# Altium PCB endstop.PcbDoc
Units mm, origin at the board's own origin, x right, y up, seen from the top; angles counter-clockwise.
Board outline 6.4 x 12 mm, 2 copper layers (Top Layer, Bottom Layer); 10 components, 7 nets, 21 pads, 5 vias.
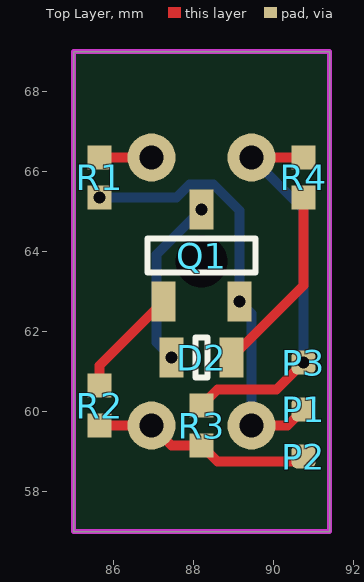
[diagram p0: Top Layer view]
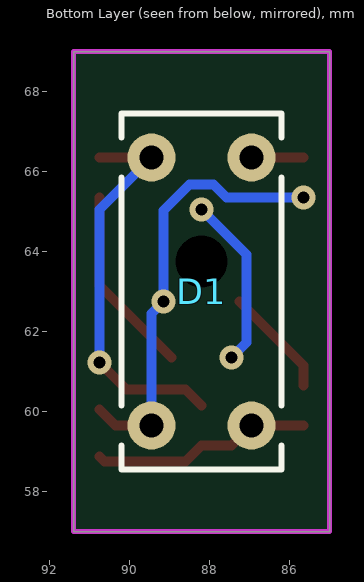
[diagram p1: Bottom Layer view, seen from below]

## Layer stack, top to bottom
Top Solder: solder mask 0.0102, Solder Resist, Dk 3.5
Top Layer: signal copper 0.0356
Dielectric 1: dielectric 0.32, FR-4, Dk 4.8
Bottom Layer: signal copper 0.0356
Bottom Solder: solder mask 0.0102, Solder Resist, Dk 3.5

## Board outline
85,57 91.4,57 91.4,69 85,69

## Design rules (kind name [scope] priority, off if disabled: settings)
Clearance [All] p1: gap=0.127 ignorepadtopadclearanceinfootprint=FALSE except(0: Arc-Hole Track-Hole SMDPad-Hole THPad-Hole Via-Hole Fill-Hole Poly-Hole Region-Hole Text-Hole)
ComponentClearance [All] p1: gap=0.01 collisioncheckmode=3 verticalgap=0.01 showdistances=FALSE
HoleSize [All] p1: absolutevalues=TRUE maxlimit=6.3 minlimit=0.2 maxpercent=80.000 minpercent=20.000
MinimumSolderMaskSliver [All] p1: minsoldermaskwidth=0.01
PolygonConnect [All] p1: connectstyle=Direct reliefconductorwidth=0.254 reliefentries=4 polygonreliefangle="90 Angle" airgapwidth=0.254
RoutingCorners [All] p1: cornerstyle=90-Degree minsetback=2.54 maxsetback=2.54
RoutingTopology [All] p1: topology=Horizontal
RoutingVias [All] p1: holewidth=0.2 width=0.5 viastyle="Through Hole" minholewidth=0.2 minwidth=0.45 maxholewidth=6.3 maxwidth=6.35
SilkToSilkClearance [All] p1: silktosilkclearance=0.1
SilkToSolderMaskClearance [IsPad] p1: minsilkscreentomaskgap=0.1 clearancetoexposedcopper=TRUE
SolderMaskExpansion [All] p1: expansion=0.102 istentingtop=FALSE
Width [All] p1: maxlimit=10 minlimit=0.089 preferedwidth=0.25 minimp=50.000000 maximp=50.000000 favimp=50.000000
23 further rules are at their usual default settings.

## Components (designator, comment, footprint, x,y, rotation, side; value= is the part's Value field where it differs from the comment)
D1 "Omron EE-SX1025" EE-SX1025 86.95,66.35 r270 bottom
D2 "SMD LED" 0603 87.45,61.35 r0 top
P1 "1-Signal" 1-SignalSmall 90.75,60.05 r270 top
P2 "1-Signal" 1-SignalSmall 90.75,58.875 r0 top
P3 "1-Signal" 1-SignalSmall 90.75,61.225 r0 top
Q1 "Si2301CDS" SOT23-3 87.25,62.75 r0 top
R1 "200" 0402 85.65,65.35 r90 top
R2 "200" 0402 85.65,59.65 r90 top
R3 "510" 0402 88.2,60.15 r270 top
R4 "200" 0402 90.75,66.35 r270 top

## Footprints (in the part's own frame and the unit in brackets; to place one, negate y for a bottom-side part, rotate by r counter-clockwise, add the part's x,y. Pads: shape width x height; smd on the part's side, far side on the other; paste and mask are expansions set on the pad)
1-SignalSmall [mm]
  rrect50% 0.6x0.6 smd paste-1: 1(0,0)
0402 [mm]
  rect 0.6x0.6 smd: 1(0,0) 2(1,0)
0603 [mm]
  rect 0.6x1 smd: 1(0,0) 2(1.5,0)
  silkscreen extent 0.6,-0.5 0.9,0.5
EE-SX1025 [mm]
  round 1.2 hole 0.6: 1(0,0) 2(0,-2.5) 3(6.7,-2.5) 4(6.7,0)
  round 1 hole 1.3 unplated: ""(2.6,-1.25)
  silkscreen extent -1.1,-3.25 7.8,0.75
SOT23-3 [mm]
  rect 0.6x1 smd: 1(0,0) 2(1.9,0) 3(0.95,2.3)
  silkscreen extent -0.4,0.72 2.3,1.58

## Part data
D1: library part EE-SX1025
R1 R2 R3 R4: library part Res

## Via types
v1: diameter 0.6, hole 0.3, Top Layer to Bottom Layer, tented both sides, 5 vias

## Nets (pads, with @x,y where several pads share a name; then routed paths per layer and width w, separated by ;. In a path a pad name is that pad's centre, name@x,y a point inside that pad or via, vN(x,y) a via of type N, cw(c..) or ccw(c..) an arc to the next point about the centre after c; other vN are vias at no path point)
GND: D1.2 P3.1 R3.1 R4.1 | length 10
  Top Layer w0.25: R3.1 88.6,60.55 90.075,60.55 v1(90.75,61.225) ; D1.2 R4.1
  Bottom Layer w0.25: D1.2 90.75,65.05 v1(90.75,61.225)
NetD1_1: D1.1 R1.2 | length 1.3
  Top Layer w0.25: R1.2 D1.1
NetD1_4: D1.4 P2.1 R2.1 R3.2 | length 5.5
  Top Layer w0.25: R2.1 D1.4 87.45,59.15 R3.2 88.6,58.75 90.625,58.75 P2.1
NetD2_1: D2.1 Q1.3 | length 4.3
  Bottom Layer w0.25: v1(87.45,61.35) 87.075,61.725 87.075,63.925 v1(88.2,65.05)
NetD2_2: D2.2 R4.2 | length 4.7
  Top Layer w0.25: D2.2 90.75,63.15 R4.2
NetQ1_1: Q1.1 R2.2 | length 2.8
  Top Layer w0.25: R2.2 85.65,61.15 Q1.1
VCC: D1.3 P1.1 Q1.2 R1.1 | length 10.9
  Top Layer w0.25: D1.3 90.35,59.65 P1.1
  Bottom Layer w0.25: v1(85.65,65.35) 87.575,65.35 87.9,65.675 88.5,65.675 89.15,65.025 v1(89.15,62.75) 89.45,62.45 D1.3
pads on no net: D1.

## Keep-outs
Keep-Out Layer:
  the board outline again, w0.127